# Altium PCB ESP32C_RF.PcbDoc
Units mil, origin at the board's own origin, x right, y up, seen from the top; angles counter-clockwise.
Board outline 1590 x 1660 mil, 4 copper layers (L1(Sig), L2 (GND), L3(GND), L4(Sig)), stack 62.63 mil thick; 55 components, 45 nets, 205 pads, 89 vias.
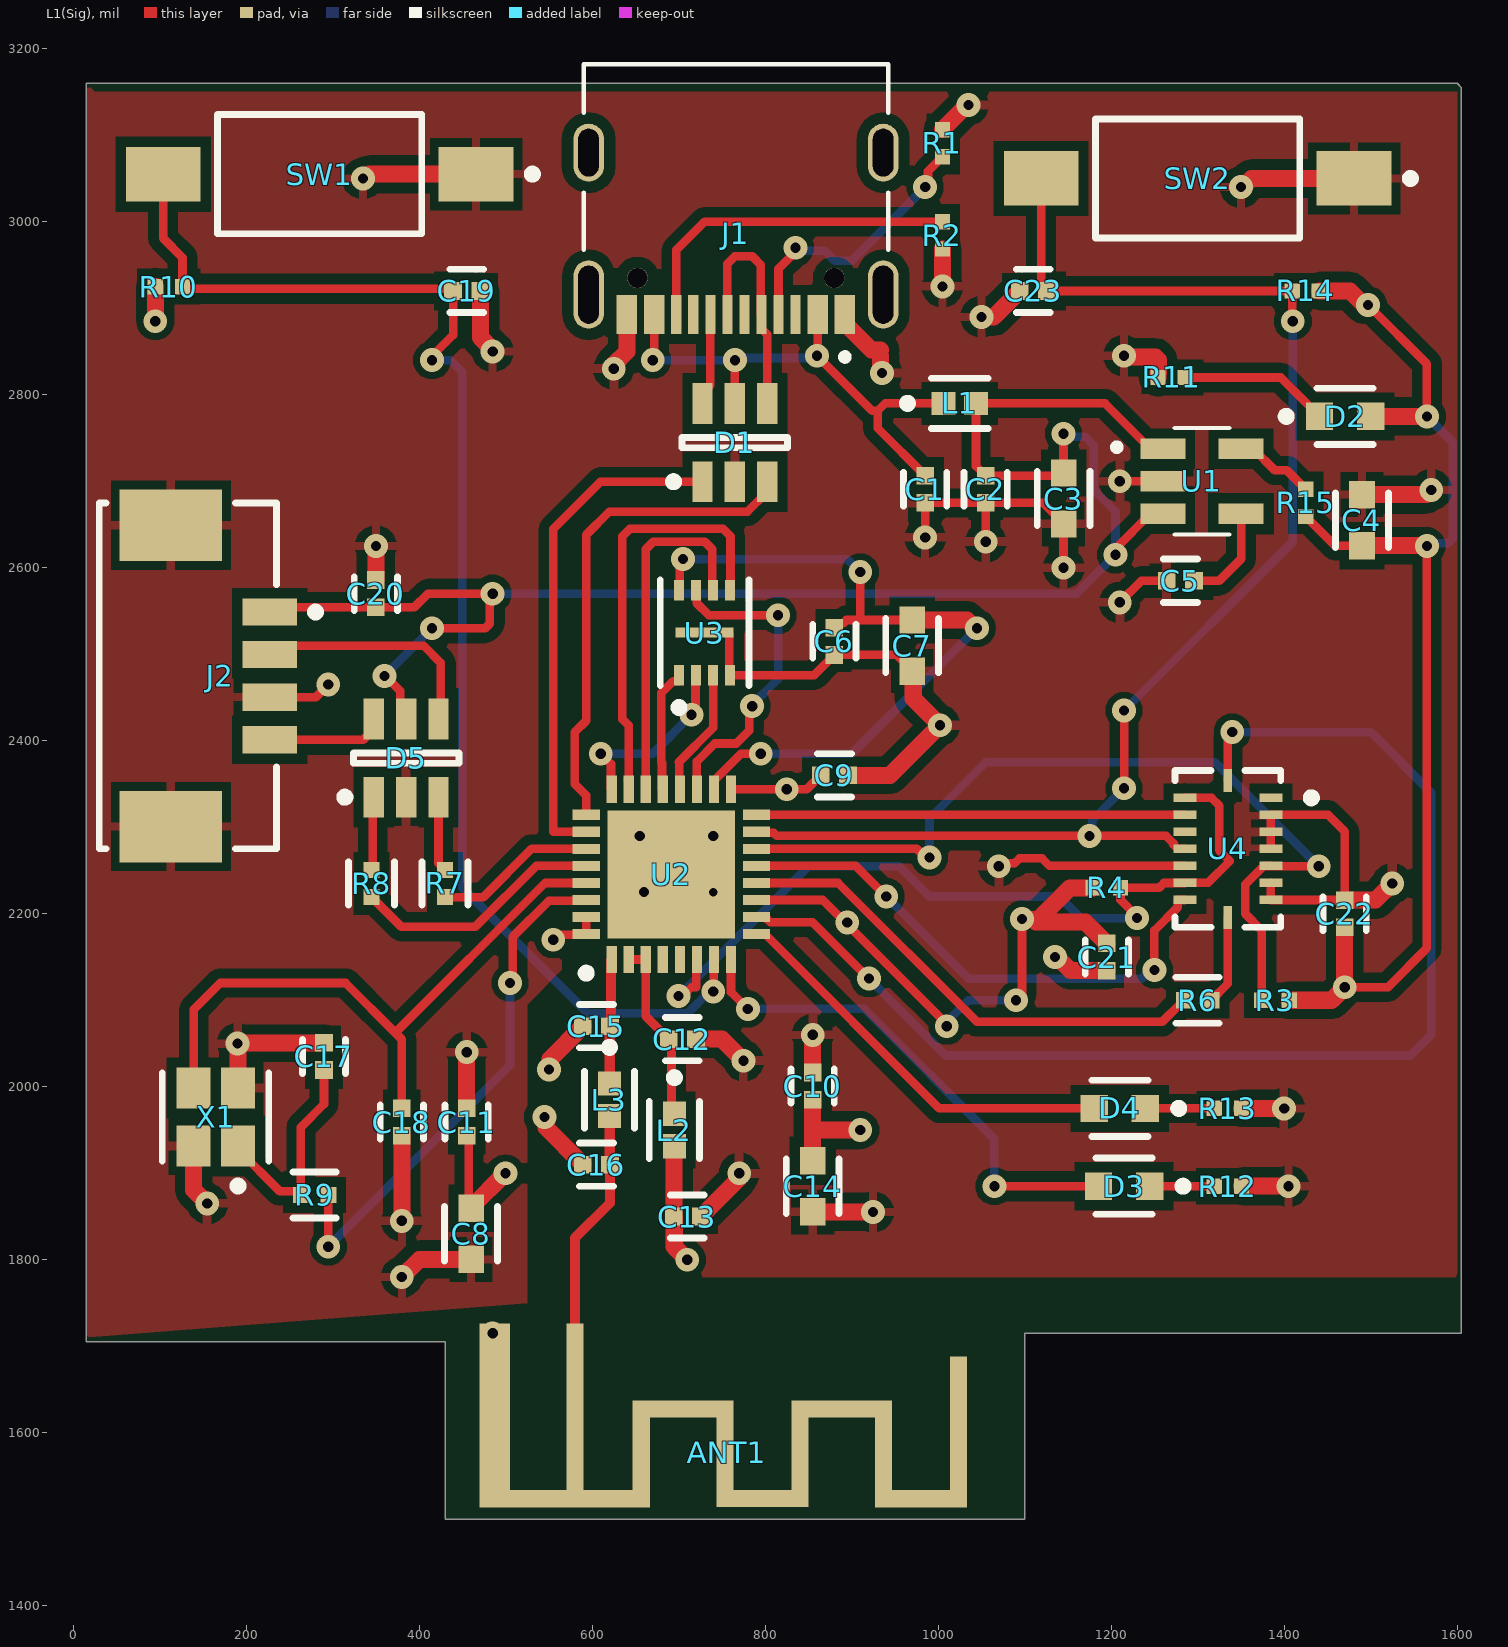
[diagram p0: L1(Sig) view]
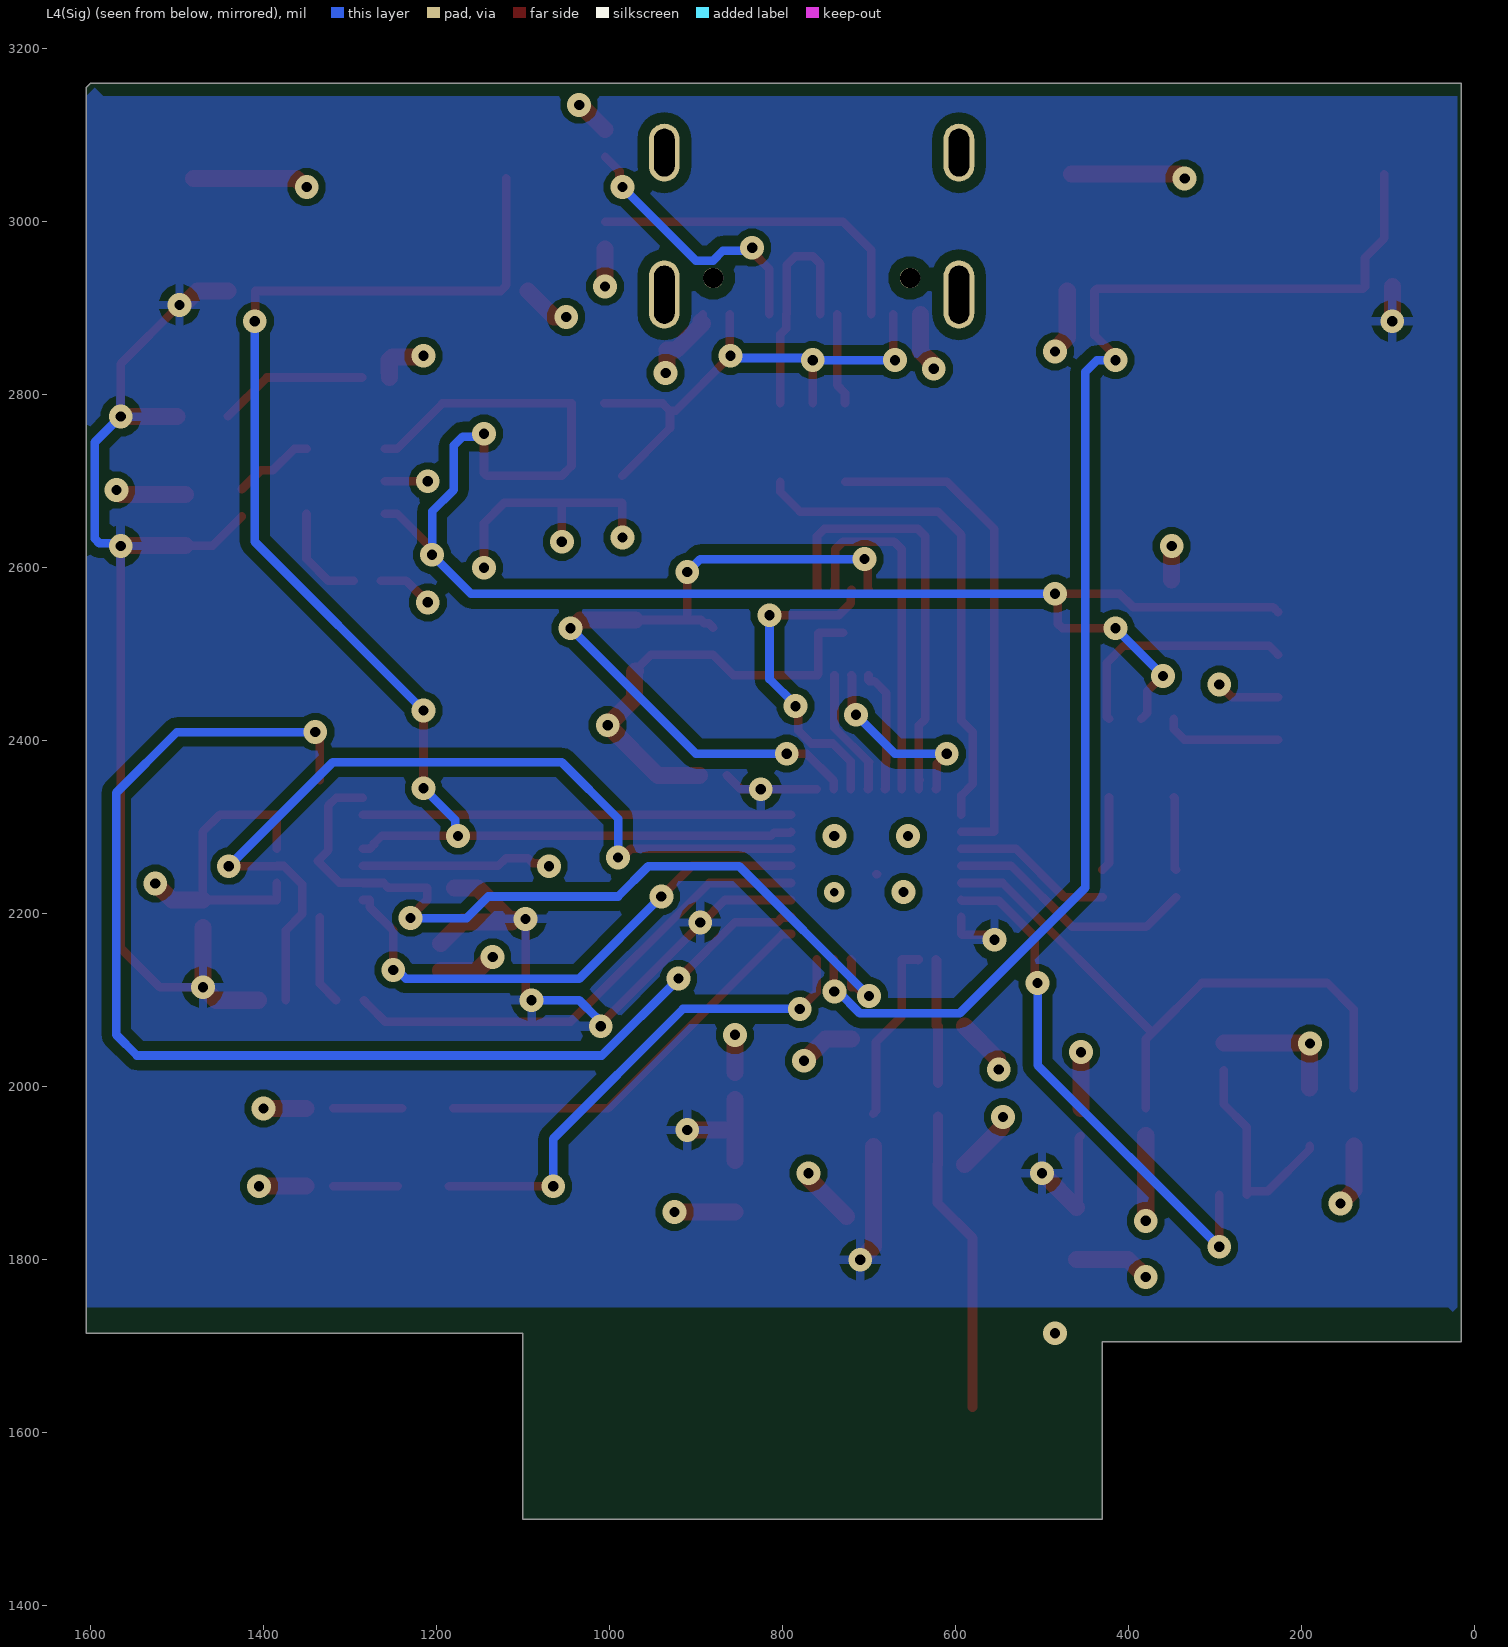
[diagram p1: L4(Sig) view, seen from below]
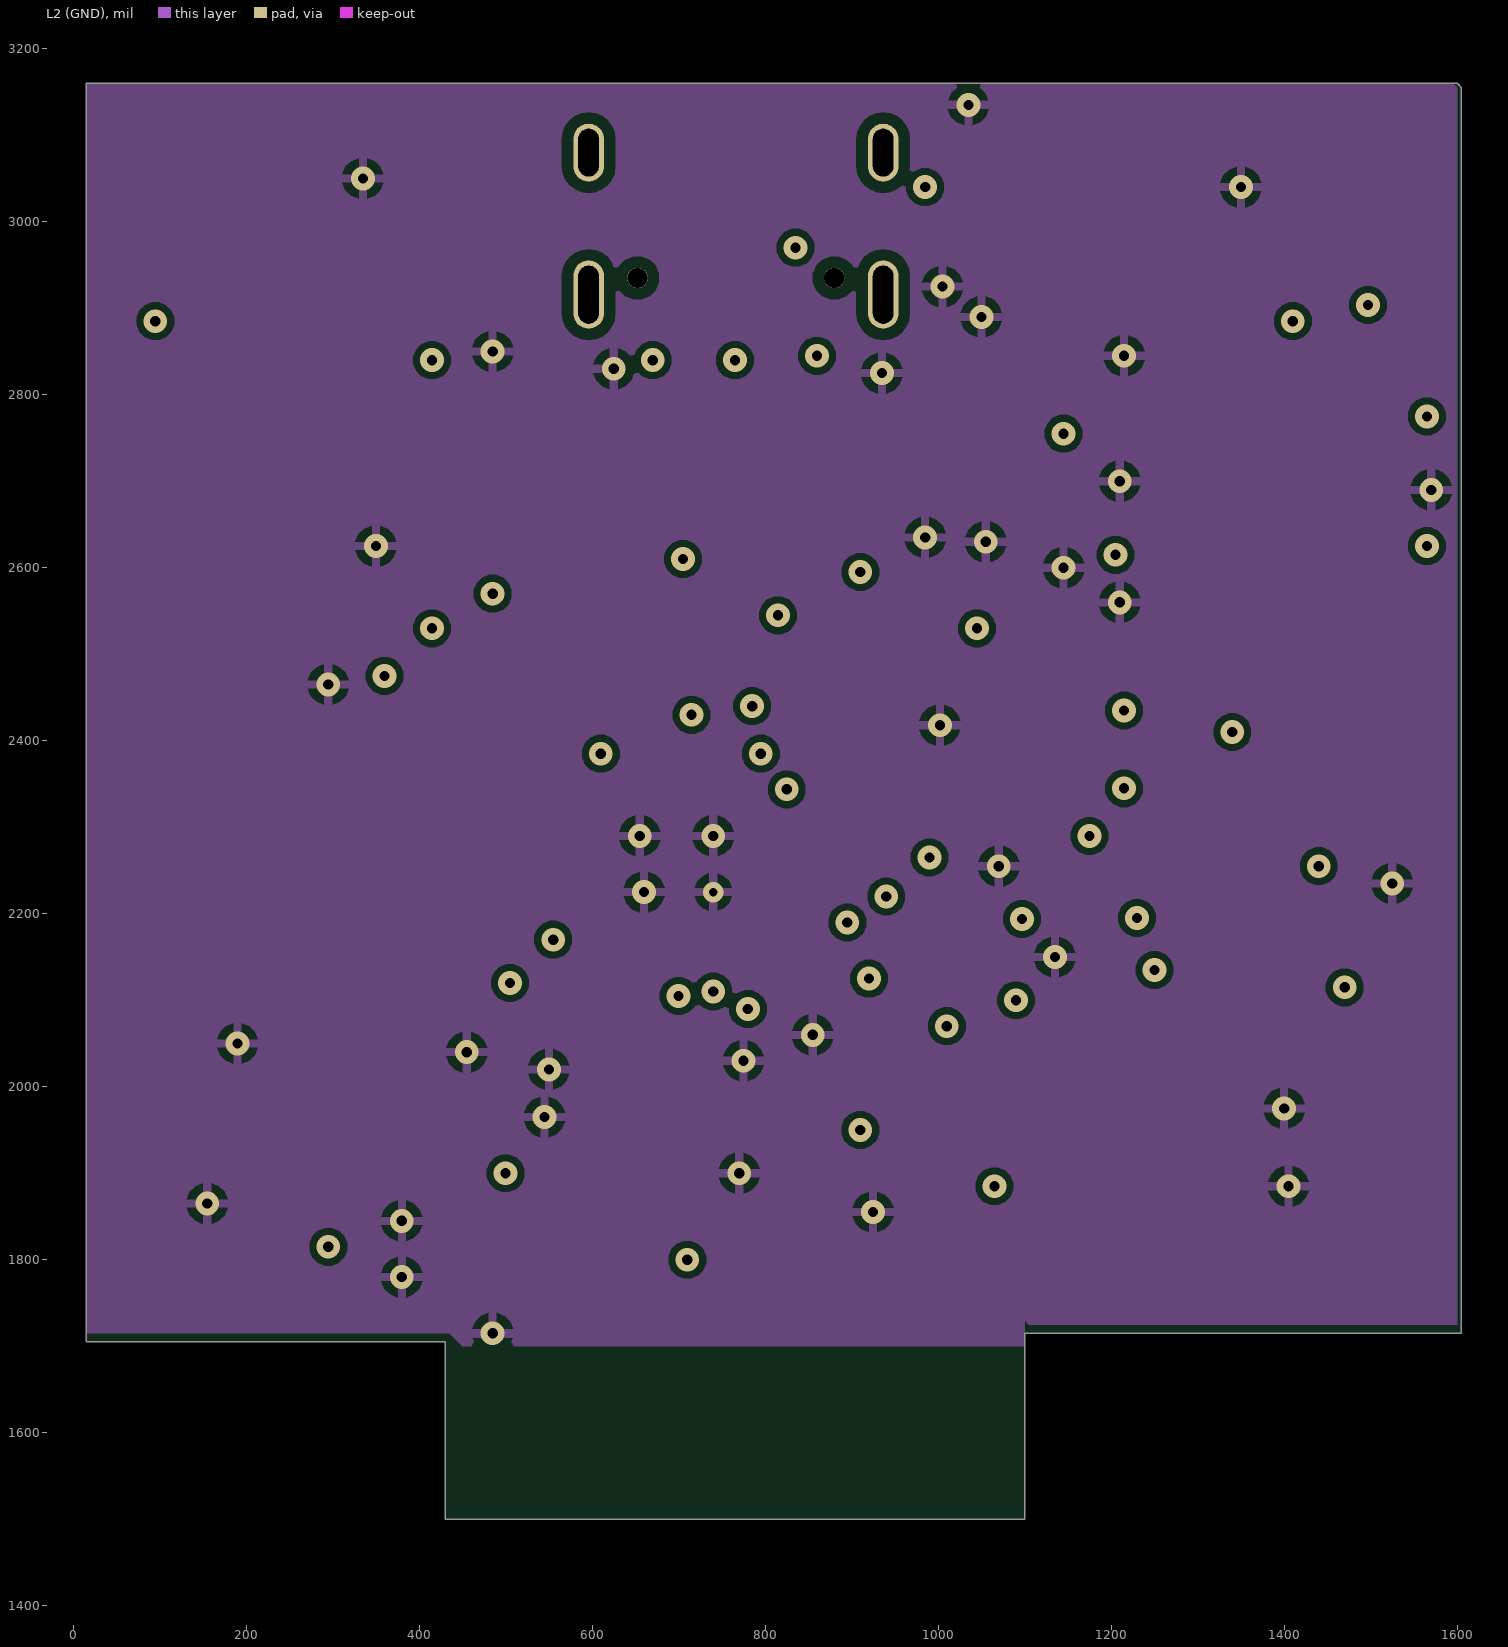
[diagram p2: L2 (GND)]
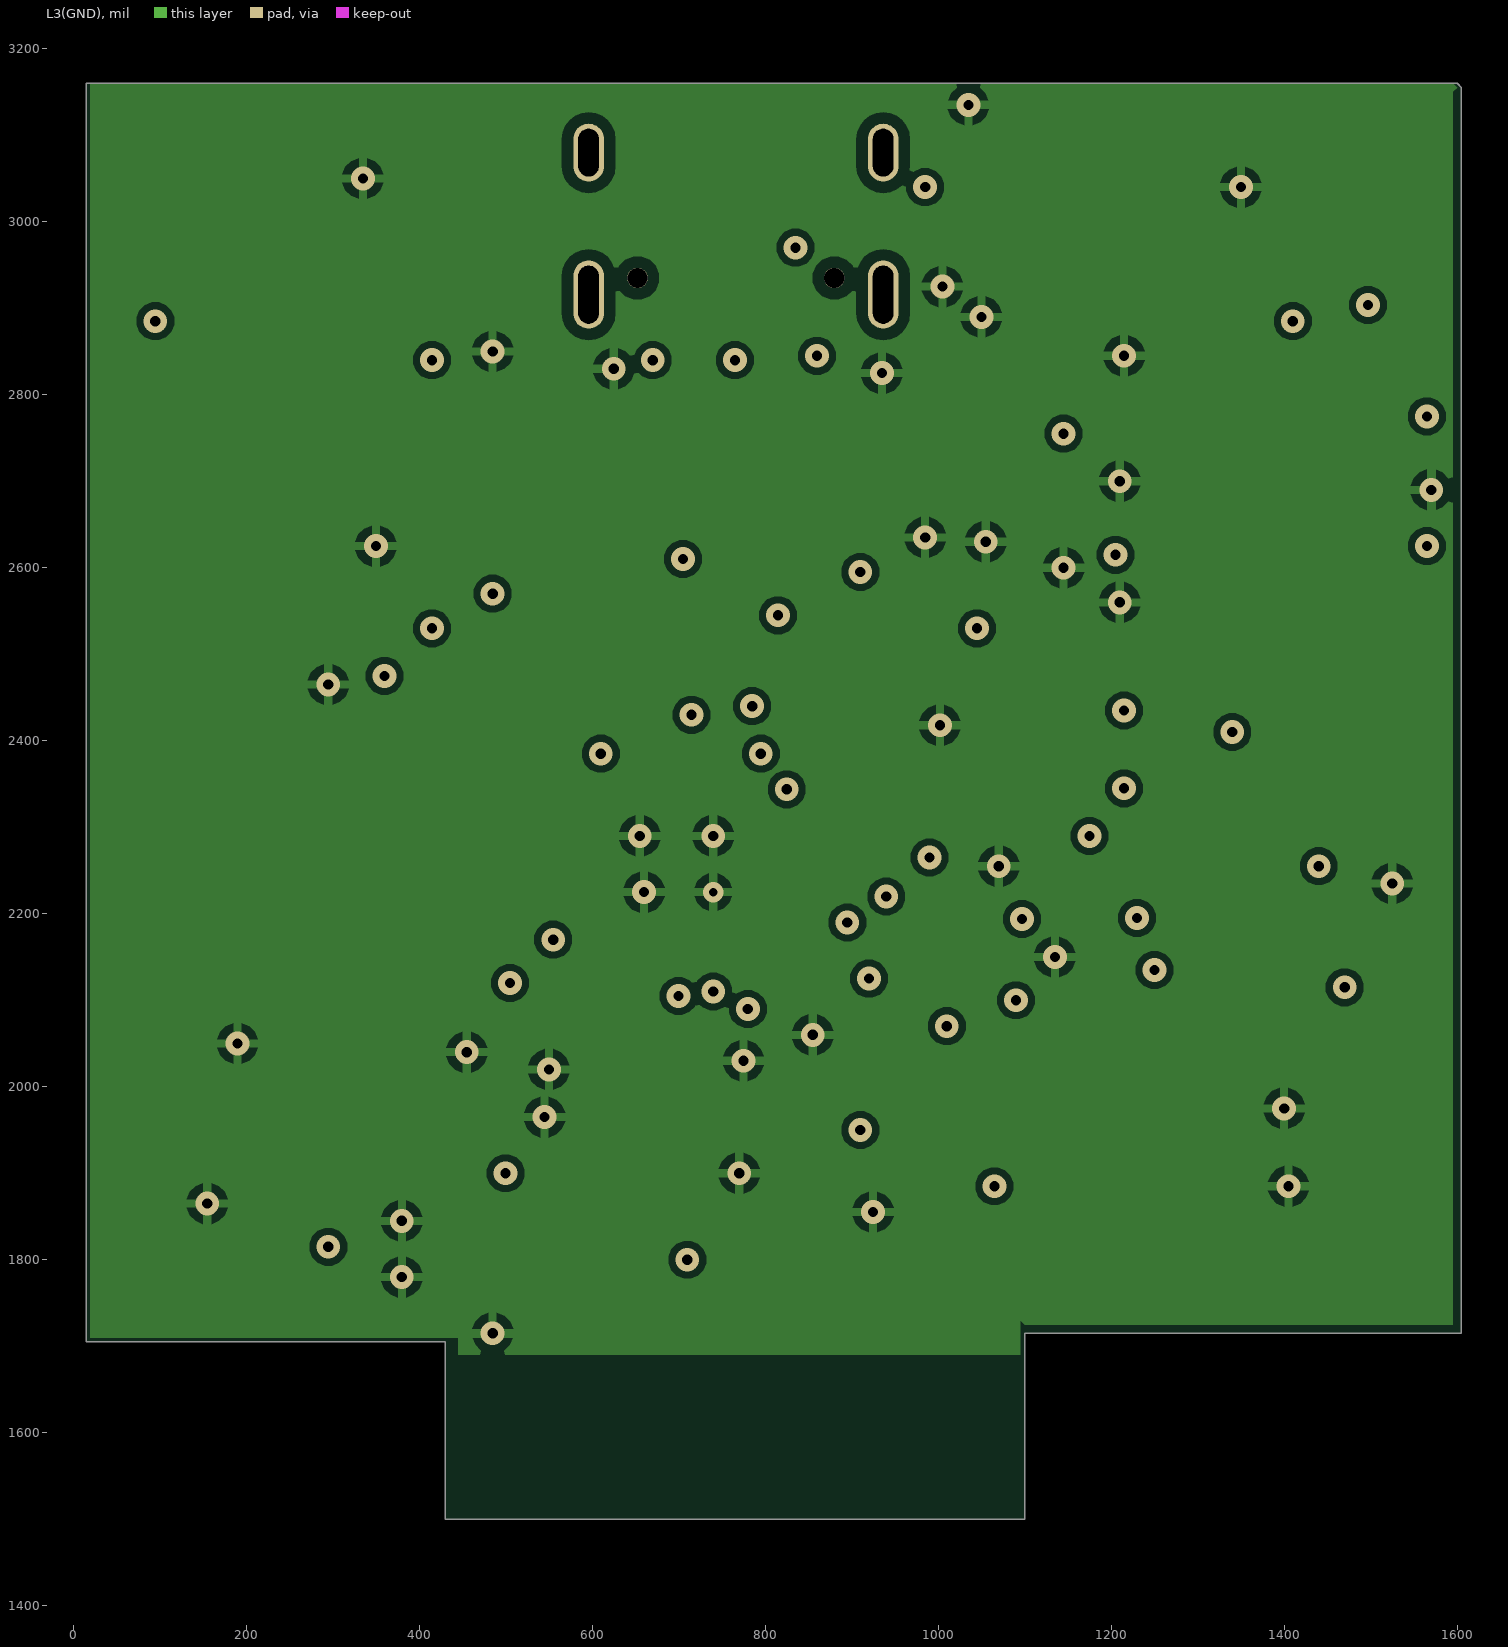
[diagram p3: L3(GND)]
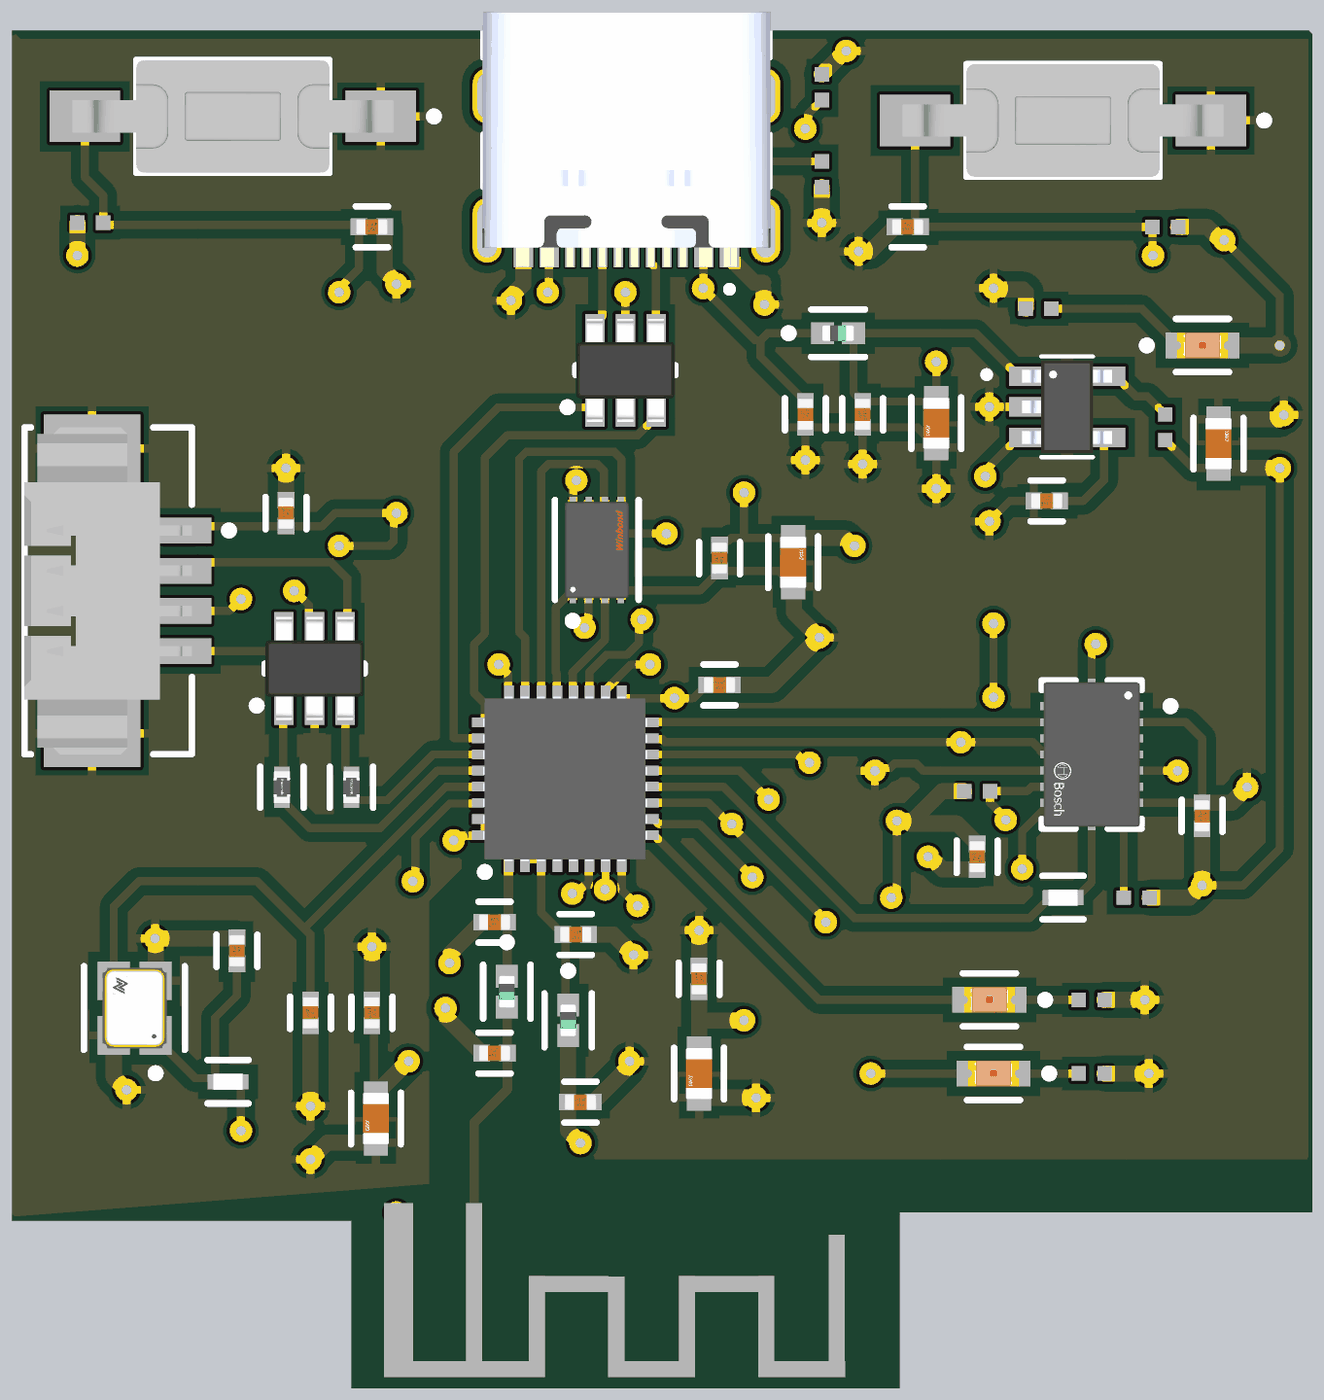
[diagram p4: 3D render of the assembled board from above, using the file's embedded part models]

## Layer stack, top to bottom
Top Solder: solder mask 1, SM-003, Dk 4
L1(Sig): signal copper 1.378
Dielectric 2: prepreg 8.2835, PP-017, Dk 4.3
L2 (GND): signal copper 0.689
Dielectric 1: core 41.9291, Core-039, Dk 4.8
L3(GND): signal copper 0.689
Dielectric 3: prepreg 8.2835, PP-017, Dk 4.3
L4(Sig): signal copper 1.378
Bottom Solder: solder mask 1, SM-003, Dk 4

## Board outline
1100,1715 1605,1715 1605,3155 1600,3160 15,3160 15,1705 430,1705 430,1500 1100,1500

## Design rules (kind name [scope] priority, off if disabled: settings)
Clearance [All] p1: gap=5.91 ignorepadtopadclearanceinfootprint=FALSE except(7.87: Arc-Via Track-Via Via-Fill Via-Poly Via-Region; 10: Via-Via; 11.81: Arc-Fill Arc-Poly Arc-Region Track-Fill Track-Poly Track-Region SMDPad-Fill SMDPad-Poly SMDPad-Region Fill-Fill Fill-Poly Fill-Region Poly-Poly Poly-Region Region-Region; 12.99: Arc-THPad Track-THPad THPad-Fill THPad-Poly THPad-Region; 19.68: Arc-Arc Arc-Track Track-Track)
DiffPairsRouting [All] p1: maxlimit=10 minlimit=10 mostfreqgap=10 toplayer_minwidth=7.87 toplayer_maxwidth=15 toplayer_prefwidth=15 midlayer1_minwidth=7.87 midlayer1_maxwidth=15 midlayer1_prefwidth=15 midlayer2_minwidth=7.87 midlayer2_maxwidth=15 midlayer2_prefwidth=15 bottomlayer_minwidth=7.87 bottomlayer_maxwidth=15 bottomlayer_prefwidth=15 maxuncoupledlength=500
PolygonConnect [All] p1: connectstyle=Relief reliefconductorwidth=10 reliefentries=4 polygonreliefangle="90 Angle" airgapwidth=10
RoutingVias [All] p1: holewidth=7.87 width=19.68 viastyle="Through Hole" minholewidth=7.87 minwidth=19.68 maxholewidth=39.37 maxwidth=39.37
SolderMaskExpansion [All] p1: expansion=4 istentingtop=FALSE
Width [All] p1: maxlimit=23.62 minlimit=9.84 preferedwidth=10
29 further rules are at their usual default settings.

## Classes and differential pairs
differential pair MCU_USB_D: +MCU_USB_D_P -MCU_USB_D_N

## Components (designator, comment, footprint, x,y, rotation, side; value= is the part's Value field where it differs from the comment)
ANT1 "Antenna AN043" Antenna_AN043 454.21,1720.75 r0 top
C1 "100n" FP-C0402-BB-MFG 985,2690.75 r270 top value="0.10 μF"
C2 "100n" FP-C0402-BB-MFG 1055,2690.75 r270 top value="0.10 μF"
C3 "10u" FP-0603-L_1_6_0_15-W_0_81-MFG 1145,2680 r270 top
C4 "10u" FP-0603-L_1_6_0_15-W_0_81-MFG 1490,2655 r90 top
C5 "100n" FP-C0402-BB-MFG 1280,2585 r180 top value="0.10 μF"
C6 "100n" FP-C0402-BB-MFG 880,2515 r270 top value="0.10 μF"
C7 "10u" FP-0603-L_1_6_0_15-W_0_81-MFG 970,2510 r90 top
C8 "10u" FP-0603-L_1_6_0_15-W_0_81-MFG 460,1830 r270 top
C9 "100n" FP-C0402-BB-MFG 880,2360 r0 top value="0.10 μF"
C10 "100n" FP-C0402-BB-MFG 855,2000.75 r90 top value="0.10 μF"
C11 "100n" FP-C0402-BB-MFG 455,1959.25 r90 top value="0.10 μF"
C12 "100n" FP-C0402-BB-MFG 704.25,2055 r0 top value="0.10 μF"
C13 "100n" FP-C0402-BB-MFG 710,1850 r0 top value="0.10 μF"
C14 "10u" FP-0603-L_1_6_0_15-W_0_81-MFG 855,1885 r270 top
C15 "3.3pF" FP-C0402-BB-MFG 605,2070 r180 top value="0.10 μF"
C16 "3.3pF" FP-C0402-BB-MFG 605,1910 r180 top value="0.10 μF"
C17 "10p" FP-C0402-BB-MFG 290,2035 r90 top value="0.10 μF"
C18 "10p" FP-C0402-BB-MFG 380,1959.25 r270 top value="0.10 μF"
C19 "100n" FP-C0402-BB-MFG 455,2920 r0 top value="0.10 μF"
C20 "100n" FP-C0402-BB-MFG 350,2570 r90 top value="0.10 μF"
C21 "100n" FP-C0402-BB-MFG 1195,2150 r270 top value="0.10 μF"
C22 "100n" FP-C0402-BB-MFG 1470,2200 r90 top value="0.10 μF"
C23 "100n" FP-C0402-BB-MFG 1110,2920 r180 top value="0.10 μF"
D1 "USBLC6-2SC6" STM-SOT23-6L_V 765,2744.72 r90 top
D2 "LTST-C190KRKT" FP-LTST-C190KRKT-MFG 1470.47,2775 r0 top
D3 "LTST-C190KRKT" FP-LTST-C190KRKT-MFG 1215,1885 r180 top
D4 "LTST-C190KRKT" FP-LTST-C190KRKT-MFG 1210,1975 r180 top
D5 "USBLC6-2SC6" STM-SOT23-6L_V 385,2380 r90 top
J1 "TYPE-C-31-M-12" HRO_TYPE-C-31-M-12 766.22,3079.88 r180 top
J2 "53261-0471" MOLEX-53261-0471_V 170,2475 r270 top
L1 "2.2nH" FP-LQG15HH_02-IPC_A 1025,2790 r0 top
L2 "2.2nH" FP-LQG15HH_02-IPC_A 695,1950 r270 top
L3 "2.2nH" FP-LQG15HH_02-IPC_A 620,1985 r270 top
R1 "5.1k" RESC1005X40X25LL05T05 1005,3090.75 r270 top
R2 "5.1k" RESC1005X40X25LL05T05 1005,2984.25 r90 top
R3 "5.1K" RESC1005X40X25LL05T05 1390,2100 r0 top
R4 "5.1k" RESC1005X40X25LL05T05 1195,2230 r180 top
R6 "22R" FP-CRCW0402-e3-IPC_C 1300,2100 r180 top
R7 "470R" FP-ERJ2RK-IPC_C 430,2235 r270 top
R8 "470R" FP-ERJ2RK-IPC_C 345,2235 r270 top
R9 "22R" FP-CRCW0402-e3-IPC_C 279.17,1875 r180 top
R10 "5.1k" RESC1005X40X25LL05T05 110.75,2925 r180 top
R11 "1K" RESC1005X40X25LL05T05 1270,2820 r0 top
R12 "1K" RESC1005X40X25LL05T05 1335,1885 r180 top
R13 "1K" RESC1005X40X25LL05T05 1335,1975 r180 top
R14 "5.1k" RESC1005X40X25LL05T05 1425,2920 r0 top
R15 "5.1k" RESC1005X40X25LL05T05 1425,2675 r90 top
SW1 "FSMSMTR" TECO-FSMSMTR_V 285,3055 r180 top
SW2 "FSMSMTR" TECO-FSMSMTR_V 1300,3050 r180 top
U1 "SPX3819M5-L-3-3" SOT95P280X145-5N 1305,2700 r0 top
U2 "ESP32-C3" QFN50P500X500X90-33N-D 691.57,2245.47 r90 top
U3 "W25Q16JVUXIQ" FP-UX-MFG 730,2525 r90 top
U4 "BMI055" FP-BMI055-MFG 1335,2275 r0 top
X1 "40MHz" FP-NX2520SA-MFG 165,1965 r90 top

## Footprints (in the part's own frame and the unit in brackets; to place one, negate y for a bottom-side part, rotate by r counter-clockwise, add the part's x,y. Pads: shape width x height; smd on the part's side, far side on the other; paste and mask are expansions set on the pad)
Antenna_AN043 [mm]
  rect 0.5x4.9 smd mask+0: 1(3.195,-2.305)
  rect 0.9x4.9 smd mask+0: 2(0.845,-2.31)
  rect 5x0.5 smd mask+0: 3(2.895,-5.005)
  rect 0.5x2.64 smd mask+0: 4(5.145,-3.435) 6(7.61,-3.445) 8(9.807,-3.433) 10(12.265,-3.435)
  rect 2x0.5 smd mask+0: 5(6.365,-2.37) 9(11.027,-2.368)
  rect 2.7x0.5 smd mask+0: 7(8.708,-5.002) 11(13.363,-5.005)
  rect 0.5x3.94 smd mask+0: 12(14.46,-2.798)
FP-0603-L_1_6_0_15-W_0_81-MFG [mm]
  rect 0.8x0.75 smd paste+0 mask+0: 1(-0.75,0) 2(0.75,0)
  silkscreen extent -0.8,-0.77 0.8,0.77, body extent -1.25,-0.58 1.25,0.58, height 0.25
FP-BMI055-MFG [mm]
  rect 0.675x0.25 smd paste+0 mask+0: 1(1.262,1.5) 2(1.262,1) 3(1.262,0.5) 4(1.262,0) 5(1.262,-0.5) 6(1.262,-1) 7(1.262,-1.5) 9(-1.262,-1.5) 10(-1.262,-1) 11(-1.262,-0.5) 12(-1.262,0) 13(-1.262,0.5) 14(-1.262,1) 15(-1.262,1.5)
  rect 0.25x0.675 smd paste+0 mask+0: 8(0,-2.013) 16(0,2.013)
  silkscreen extent -1.55,-2.3 2.58,2.3, body extent -2.1,-2.85 2.1,2.85, height 0.25
FP-C0402-BB-MFG [mm]
  rect 0.52x0.52 smd paste+0 mask+0: 1(-0.4,0) 2(0.4,0)
  silkscreen extent -0.5,-0.64 0.5,0.64, body extent -0.8,-0.4 0.8,0.4, height 0.25
FP-CRCW0402-e3-IPC_C [mil]
  rect 18.43x18.6 smd paste+0 mask+0: 1(-15.83,0) 2(15.83,0)
  silkscreen extent -25,-27 25,27, body extent -29,-15 29,15, height 10
FP-ERJ2RK-IPC_C [mil]
  rect 18.43x18.6 smd paste+0 mask+0: 1(-15.83,0) 2(15.83,0)
  silkscreen extent -25,-27 25,27, body extent -29,-15 29,15, height 10
FP-LQG15HH_02-IPC_A [mil]
  rect 28.16x26.48 smd paste+0 mask+0: 1(-18.84,0) 2(18.84,0)
  silkscreen extent -65,-29 33,29, body extent -41,-21 41,21, height 10
FP-LTST-C190KRKT-MFG [mm]
  rect 0.8x0.8 smd paste+0 mask+0: 1(-0.75,0) 2(0.75,0)
  silkscreen extent -1.85,-0.82 0.82,0.82, body extent -1.25,-0.55 1.25,0.55, height 0.25
FP-NX2520SA-MFG [mm]
  rect 1.2x1 smd paste+0 mask+0: 1(-0.85,-0.65) 2(0.85,-0.65) 3(0.85,0.65) 4(-0.85,0.65)
  silkscreen extent -2.15,-1.56 1.3,1.58, body extent -1.55,-1.25 1.55,1.25, height 0.25
FP-UX-MFG [mm]
  rect 0.6x0.3 smd paste-1000 mask-1000: 1(-1.25,0.75) 2(-1.25,0.25) 3(-1.25,-0.25) 4(-1.25,-0.75) 5(1.25,-0.75) 6(1.25,-0.25) 7(1.25,0.25) 8(1.25,0.75)
  rect 0.3x1.7 smd paste-1000 mask+0: 9(0,0)
  silkscreen extent -2.32,-1.3 1.55,1.3, body extent -1.75,-1.15 1.75,1.15, height 0.25
HRO_TYPE-C-31-M-12 [mm]
  rect 0.6x1.14 smd mask+0.05: A1_B12(-3.2,4.75) A4_B9(-2.4,4.75) B1_A12(3.2,4.75) B4_A9(2.4,4.75)
  rect 0.3x1.14 smd mask+0.05: A5(-1.25,4.75) A6(-0.25,4.75) A7(0.25,4.75) A8(1.25,4.75) B5(1.75,4.75) B6(0.75,4.75) B7(-0.75,4.75) B8(-1.75,4.75)
  oval 0.9x2 hole 0.6 slot 1.7 at 90 deg: S1(-4.325,4.17) S2(4.325,4.17)
  oval 0.9x1.7 hole 0.6 slot 1.4 at 90 deg: S3(-4.325,0) S4(4.325,0)
  round 0.6 hole 0.6 unplated: ""(-2.89,3.68) ""(2.89,3.68)
  silkscreen extent -4.47,-2.6 4.47,6.1, body extent -4.47,-2.6 4.47,5.31, height 3.31
MOLEX-53261-0471_V [mm] "SMD, 4-Leads, Body 10.15x5.2mm, Pitch 1.25mm"
  rect 0.8x1.6 smd: 1(-1.875,1.45) 2(-0.625,1.45) 3(0.625,1.45) 4(1.875,1.45)
  rect 2.1x3 smd: MP1(-4.425,-1.45) MP2(4.425,-1.45)
  silkscreen extent -5.08,-3.55 5.08,2.93, body extent -5.08,-3.55 5.07,1.65, height 3.4
QFN50P500X500X90-33N-D [mm]
  rect 0.8x0.3 smd: 1(-2.5,1.75) 2(-2.5,1.25) 3(-2.5,0.75) 4(-2.5,0.25) 5(-2.5,-0.25) 6(-2.5,-0.75) 7(-2.5,-1.25) 8(-2.5,-1.75) 17(2.5,-1.75) 18(2.5,-1.25) 19(2.5,-0.75) 20(2.5,-0.25) 21(2.5,0.25) 22(2.5,0.75) 23(2.5,1.25) 24(2.5,1.75)
  rect 0.3x0.8 smd: 9(-1.75,-2.5) 10(-1.25,-2.5) 11(-0.75,-2.5) 12(-0.25,-2.5) 13(0.25,-2.5) 14(0.75,-2.5) 15(1.25,-2.5) 16(1.75,-2.5) 25(1.75,2.5) 26(1.25,2.5) 27(0.75,2.5) 28(0.25,2.5) 29(-0.25,2.5) 30(-0.75,2.5) 31(-1.25,2.5) 32(-1.75,2.5)
  rect 3.75x3.75 smd: 33(0,0)
  silkscreen extent -3.02,2.37 -2.78,2.62, body extent -2.56,-2.54 2.54,2.56, height 0.9
RESC1005X40X25LL05T05 [mm] "Chip Resistor, 2-Leads, Body 1.00x0.50mm, IPC High Density"
  rect 0.45x0.45 smd: 1(-0.4,0) 2(0.4,0)
  body extent -0.53,-0.27 0.53,0.28, height 0.4
SOT95P280X145-5N [mm]
  rect 1.32x0.6 smd: 1(-1.15,0.95) 2(-1.15,0) 3(-1.15,-0.95) 4(1.15,-0.95) 5(1.15,0.95)
  silkscreen extent -2.6,-1.56 0.8,1.56, body extent -1.4,-1.45 1.4,1.45, height 1.45
STM-SOT23-6L_V [mm] "SOT23, 6-Leads, Body 3.05x1.75mm, Pitch 0.95mm"
  rect 1.2x0.6 smd: 1(-1.15,0.95) 2(-1.15,0) 3(-1.15,-0.95) 4(1.15,-0.95) 5(1.15,0) 6(1.15,0.95)
  silkscreen extent -1.27,-1.55 0.15,1.92, body extent -1.6,-1.53 1.6,1.53, height 1.45
TECO-FSMSMTR_V [mm] "SMD, 2-Leads, Body 6x3.5mm, Pitch 9.19mm"
  rect 2.2x1.6 smd: 1(-4.595,0)
  rect 2.18x1.6 smd: 2(4.595,0)
  silkscreen extent -6.37,-1.75 3,1.75, body extent -4.98,-1.75 4.98,1.75, height 4.4

## Part data
C1 C2 C5 C6 C9 C10 C11 C12 C13 C15 C16 C17 C18 C19 C20 C21 C22 C23: library part CMP-2008-02046-2, "CAP CER 0.1UF 10V X5R 0402", Capacitance="0.10 μF", Manufacturer=Kemet, Manufacturer Part Number=C0402C104K8PACTU, Package=C0402-BB, Temperature="-55°C to +125°C", Temperature Characteristic=X5R, Temperature Coefficient=15%, Temperature Range High=+125°C, Temperature Range Low=-55°C, Tolerance=0.1, Voltage Rating="10 V", Automotive=No, Category=Cap, ComponentLink2Description=Datasheet, ComponentLink2URL=https://content.kemet.com/datasheets/KEM_C1002_X7R_SMD.pdf, Device Class L1="Passive Components", Device Class L2=Capacitors, Device Class L3="Ceramic Capacitors", Digikey Description="CAP CER 0.1UF 10V X5R 0402", Height=0.55mm, Ipc Land Pattern Name=CAPC10050X50, Lead Free=Yes, Material=Ceramic, Mouser Description="Capacitor 100 nF 10 VDC 0402", Octopart=https://octopart.com/c0402c104k8pactu-kemet-140039, RoHS=TRUE
C3 C4 C7 C8 C14: library part CMP-1035-02592-4, "General Purpose Ceramic Capacitor, 0603, 100nF, 10%, X7R, 15%, 50V", Capacitance=100nF, Case Code (Imperial)=0603, Case Code (Metric)=1608, Dielectric=X7R, Dielectric Material=Ceramic, Max Operating Temperature=125°C, Min Operating Temperature=-55°C, Package Quantity=1, Tolerance=10%, Voltage=50V, Case/Package=0603, Contact Plating=Tin, Depth=0.81mm, Dissipation Factor=2.5%, Height=0.9mm, Lead Free="Lead Free", Length=1.6mm, Mount="Surface Mount", Number of Pins=2, Packaging="Tape and Reel", Radiation Hardening=No, REACH SVHC="No SVHC", Termination=SMD/SMT, Thickness=0.035inch, Voltage Rating=50V, Voltage Rating (DC)=50V, Width=0.81mm
D1 D5: library part CMP-2000-05378-1, "Very low capacitance ESD protection, 3.5 pF, -40 to 125 degC, 6-Pin SOT23, RoHS, Tape and Reel", Capacitance Value=3.5pF, Clamping Voltage=17V, Leakage Current=0.15uA, Manufacturer=STMicroelectronics, Operating Temp Range=-40Cto125C, Operating Temperature Classification=Automotive, Operating Temperature Max Deg. C=125C, Operating Temperature Min Deg. C=-40C, Package / Case=SOT-23, Package Description="6-Pin Small Outline Transistor, Body 2.925 x 1.625 mm, Pitch 0.95 mm", Package Reference=SOT23-6L, Peak Pulse Current=5A, Reverse Breakdown Voltage=6V, Reverse Stand-off Voltage=5V, Test Current (It)=1mA, Clamping Voltage (Max)=17V, Configuration=Dual, Datasheet URL=http://www.st.com/st-web-ui/static/active/en/resource/technical/document/datasheet/CD00050750.pdf, Datasheet Version="Rev. 5, 10/2011", Direction Type=Uni-Directional, Leakage Current (Max)=0.15uA, Manufacturer URL=http://www.st.com/, Mounting=SurfaceMount, Mounting Style=SurfaceMount, Number of Elements=1, Packaging=TapeandReel, Pin Count=6, Polarity=Uni-Directional, Product Depth (mm)=1.75mm, Product Height (mm)=1.3mm, Product Length (mm)=3.05mm, Rad Hardened=No, Suppressor Type=DiodeArrays, Working Voltage=5V, Working Voltage (Max)=5V
D2 D3 D4: library part CMP-1674-00011-2, "LED RED CLEAR CHIP SMD", Case Code (Imperial)=0603, Case Code (Metric)=1608, Color=Red, Forward Current=30mA, Forward Voltage=2.4V, Lens Color=Colorless, Max Operating Temperature=85°C, Min Operating Temperature=-55°C, Package Quantity=1, Power Dissipation=75mW, Reverse Voltage=5V, Test Current=20mA, Case/Package=0603, Depth=0.8mm, Dominant Wavelength=631nm, Height=0.8mm, Illumination Color=Red, Lead Free="Lead Free", Length=1.6mm, Lens Style=Diffused, Lens Transparency=Clear, Luminous Intensity=54mcd, Mount="Surface Mount", Number of Elements=1, Number of LEDs=1, Number of Pins=2, Packaging="Tape and Reel", Power Rating=75mW, Radiation Hardening=No, Viewing Angle=130°, Wavelength=639nm, Width=0.8mm
J1: "USB Connectors 24 Receptacle 1 8.94*7.3mm RoHS", Package=Package, Availability="Not in stock", Check_prices=https://www.snapeda.com/parts/TYPE-C-31-M-12/HRO+Electronics+Co.%252C+Ltd./view-part/?ref=eda, MF="HRO Electronics Co., Ltd.", MP=TYPE-C-31-M-12, Price=None, SnapEDA_Link=https://www.snapeda.com/parts/TYPE-C-31-M-12/HRO+Electronics+Co.%252C+Ltd./view-part/?ref=snap
J2: library part CMP-2000-05238-1, "Male Header, Pitch 1.25 mm, 1 x 4 Position, Height 3.4 mm, -40 to 85 degC, RoHS, Tape and Reel", Current Rating=1A, Manufacturer=Molex, Package Description="1.25mm Pitch PicoBlade(TM) Header, Surface Mount, Right Angle, Lead-Free, 4 Circuits", Voltage Rating=125V, Brand=Molex, Contact Material=PhosphorBronze, Contact Plating=Tin, Datasheet URL=http://www.molex.com/pdm_docs/sd/532610471_sd.pdf, Datasheet Version="Rev. G, 01/2012", Factory Pack Quantity=1000, Housing Material=Thermoplastic, Manufacturer URL=http://www.molex.com/, Mounting Angle=Right, Mounting Style=SMD/SMT, Number of Positions=4, Number of Positions / Contacts=4, Number of Rows=1, Packaging=Reel, Pitch=1.25mm, Product Category=Headers&WireHousings, Product Type=Headers, RoHS=Details, Series=53261, Termination Style=SMD, Tradename=PicoBlade, Type=Shrouded
L1 L2 L3: library part CMP-06042-011103-1, "Multilayer type RF Inductor 3.6nH ±0.3nH 0.13Ω 700mA 0402", Case Code (Imperial)=0402, Case Code (Metric)=1005, Current=300mA, DC Resistance (DCR)=190mR, Inductance=3.6nH, Max Operating Temperature=125°C, Min Operating Temperature=-55°C, Package Quantity=10000, Self Resonant Frequency=6GHz, Test Frequency=100MHz, Case/Package=0402, Core Material=Air, Current Rating=300mA, DC Current=300mA, Depth=0.55mm, Height=0.5mm, Height - Seated (Max)=0.022inch, Lead Free="Lead Free", Length=0.039inch, Max DC Current=300mA, Military Standard=Not, Mount="Surface Mount", Number of Pins=2, Packaging="Tape and Reel", Q Factor=8, Radiation Hardening=No, REACH SVHC="No SVHC", Shielding=Unshielded, Termination=SMD/SMT, Width=0.5mm
R1 R2 R3 R4 R10 R11 R12 R13 R14 R15: library part CMP-2002-08382-1, Manufacturer="Vishay Dale", Part Number=CRCW040222R0FKED
R6 R9: library part CMP-1011-00397-3, "RES Thick Film, 100Ω, 1%, 0.063W, 100ppm/°C, 0402", Case Code (Imperial)=0402, Case Code (Metric)=1005, Max Operating Temperature=155°C, Max Power Dissipation=63mW, Min Operating Temperature=-55°C, Package Quantity=10, Resistance=100R, Temperature Coefficient=100ppm/°C, Tolerance=1%, Voltage Rating=50V, Case/Package=0402, Composition="Thick Film", Contact Plating=Tin, Depth=0.5mm, Features="Automotive AEC-Q200", Height=0.35mm, Lead Free="Lead Free", Length=1mm, Military Standard=Not, Mount="Surface Mount", Number of Terminations=2, Packaging="Tape and Reel", Power Rating=63mW, Radiation Hardening=No, Termination=SMD/SMT, Voltage Rating (DC)=50V, Weight=2.3E-05oz, Width=0.02inch, Working Voltage=50V
R7 R8: library part CMP-2002-01153-2, "RES SMD 470 OHM 1% 1/10W 0402", Case Code (Imperial)=0402, Case Code (Metric)=1005, Max Operating Temperature=155°C, Max Power Dissipation=100mW, Min Operating Temperature=-55°C, Package Quantity=1, Resistance Tolerance=1%, Resistor Type="Thick Film", Temperature Coefficient=100ppm/°C, Voltage Rating=50V, Case/Package=0402, Construction=Rectangular, Contact Plating=Tin, Depth=0.5mm, Features="Automotive AEC-Q200", Height=0.35mm, Lead Free="Lead Free", Length=1mm, Military Standard=Not, Mount="Surface Mount", Number of Pins=2, Number of Terminations=2, Packaging="Tape and Reel", Power Rating=100mW, Radiation Hardening=No, Resistance=470R, RoHS Compliant=Yes, Series=ERJ, Technology="THICK FILM", Termination=SMD/SMT, Tolerance=1%, Voltage Rating (DC)=50V, Weight=2.8E-05oz, Width=0.02inch
SW1 SW2: library part CMP-2000-07501-1, "FSMSM Push Button Switch, 50 mA, -35 to 85 degC, 2-Pin SMD, RoHS, Tape and Reel", Case\/Package=SMD/SMT, Contact Current Rating=50mA, Contact Resistance=100mOhm, Manufacturer="TE Connectivity", Max Operating Temperature=85degC, Max Voltage Rating (DC)=12V, Min Operating Temperature=-35degC, Operating Force=180gf, Package Description="2-Pin Surface Mount Device, Body 6 x 3.5 mm, Pitch 9.19 mm", Package Quantity=1800, Voltage Rating (DC)=24V, Actuator Length=1.07mm, Actuator Material=Polyamide, Contact Material=Brass, Contact Plating=Silver, Current Rating=50mA, Datasheet URL=http://www.te.com/commerce/DocumentDelivery/DDEController?Action=showdoc&DocId=Customer+Drawing%7F1437566-3%7FC2%7Fpdf%7FEnglish%7FENG_CD_1437566-3_C2_1437566_3_1_c.dwg.pdf%7F1437566-4, Datasheet Version="Rev. C2, 08/2014", Electrical Life=20000Cycles, ELV=Compliant, Illumination Type=Illuminated, Lead Free=LeadFree, Manufacturer URL=http://www.te.com/, Mechanical Life=20000Cycles, Mount=SurfaceMount, Mounting Technology=SurfaceMount, Orientation=Straight, Package Reference=FSMSMTR, Packaging=TapeandReel, REACH SVHC=Unknown, RoHSCompliant=true, Switch Travel=0.25mm, Termination=GullWing, Throw Configuration=SPST
U1: "Linear Voltage Regulator IC Positive Fixed 1 Output 500mA SOT-23-5", Package="SOT-23-5 Exar", Check_prices=https://www.snapeda.com/parts/SPX3819M5-L-3-3/TR/MaxLinear%252C+Inc./view-part/?ref=eda, MF="MaxLinear, Inc.", MP=SPX3819M5-L-3-3/TR, SnapEDA_Link=https://www.snapeda.com/parts/SPX3819M5-L-3-3/TR/MaxLinear%252C+Inc./view-part/?ref=snap
U2: "Ultra­Low­Power SoC with RISC­V Single­Core CPU Supporting IEEE 802.11b/g/n (2.4 GHz Wi­Fi) and Bluetooth® 5 (LE)", LCSC=C2838500, Manufacturer=Espressif, Manufacturer Part Number=ESP32-C3
U3: library part CMP-78876-000011-1, "IC FLASH 16MBIT SPI/QUAD 8USON", RoHS Compliant=Yes
U4: library part CMP-191067-000009-1, "IMU ACCEL/GYRO I2C/SPI 16LGA", Case/Package=LGA, Max Operating Temperature=85°C, Min Operating Temperature=-40°C, Package Quantity=5000, Axis="X, Y, Z", Bandwidth=8Hz, Interface=I2C, Lead Free="Lead Free", Mount="Surface Mount", Number of Pins=16, Output Type=SPI, Packaging="Tape and Reel", Sensitivity=128LSB/g, Sensor Type=Accelerometer
X1: library part CMP-2000-05279-2, "CRYSTAL 16.0000MHZ 8PF SMD", Case/Package=SMD/SMT, ESR (Equivalent Series Resistance)=80R, Frequency=16MHz, Frequency Stability=25ppm, Frequency Tolerance=15ppm, Load Capacitance=8pF, Max Operating Temperature=85°C, Min Operating Temperature=-40°C, Package Quantity=3000, Height=0.022inch, Length=0.098inch, Mount="Surface Mount", Number of Pins=4, Packaging="Tape and Reel", Series Resistance=80R, Width=0.079inch

## Via types
v1: diameter 27.56, hole 11.81, L1(Sig) to L4(Sig), 88 vias
v2: diameter 23.62, hole 9.84, L1(Sig) to L4(Sig), 1 vias

## Nets (pads, with @x,y where several pads share a name; then routed paths per layer and width w, separated by ;. In a path a pad name is that pad's centre, name@x,y a point inside that pad or via, vN(x,y) a via of type N, cw(c..) or ccw(c..) an arc to the next point about the centre after c; other vN are vias at no path point)
+3V3: C4.1 C8.1 C9.1 C10.1 C11.1 C13.1 C14.1 C21.1 C22.1 D2.2 L2.2 R3.2 R4.2 R10.2 R14.2 R15.1 U2.11 U2.17 U2.31 U2.32 | length 2623.7
  L1(Sig) w10: C11.1 457.5,1941 457.5,1862.03 C8.1 C8.1@460,1860.51 ; v1(555,2170) 560.67,2175.67 592.24,2175.67 U2.32 U2.31 ; C13.1@694.63,1850.37 C13.1 C13.1@694.92,1849.33 ; L2.2@694.63,1930.78 L2.2 ; U2.17 v1(825,2343.9) 848.15,2343.9 C9.1 ; U2.11 866.55,2215.94 892.49,2190 v1(895,2190) 895,2187.5 1010,2072.5 v1(1010,2070) ; v1@909.76,1949.76 v1(910,1950) ; v1(1090,2100) 1096.9,2106.9 v1(1096.9,2193.82) ; R15.1 1458.78,2625.47 C4.1 ; v1(1470,2115) 1520,2115 1565,2160 v1(1565,2625) v1@1564.53,2625.47 ; v1@1492.26,2903.8 v1(1497.01,2903.8) 1565,2835.8 v1(1565,2775)
  L1(Sig) w19.68: v1(95,2885) R10.2 ; C8.1@460,1860.51 499.49,1900 v1(500,1900) ; C13.1@694.63,1850.37 L2.2@694.63,1930.78 ; C13.1@694.92,1849.33 694.92,1815.08 v1(710,1800) ; C14.1 855,1949.76 ; C10.1 855,1949.76 ; v1@909.76,1949.76 855,1949.76 ; v1(1096.9,2193.82) 1097.1,2193.62 v1@1110,2193.62 ; R4.2 1152.36,2230 1115.98,2193.62 v1@1110,2193.62 ; C21.1 1170.12,2190.63 1112.99,2190.63 v1@1110,2193.62 ; R3.2 1455,2100 v1(1470,2115) C22.1 ; R14.2 1476.05,2920 v1@1492.26,2903.8 ; C4.1 v1@1564.53,2625.47 ; D2.2 v1(1565,2775)
  L4(Sig) w10: v1(895,2190) v1@897.5,2187.5 ; v1@1015,2080 1035,2100 v1(1090,2100) ; v1(1565,2625) 1568.36,2628.36 1589.67,2628.36 1595,2633.69 1595,2745 v1(1565,2775)
+3V3_RF: C12.1 L2.1 U2.2 U2.3 | length 212.8
  L1(Sig) w10: U2.2@643.27,2146.14 U2.2 U2.3 662.05,2081.46 C12.1 691.75,2051.75 691.75,1972.09 L2.1
+VBUS: C1.1 D1.5 J1.A4_B9 J1.B4_A9 L1.1 | length 617.6
  L1(Sig) w10: v1(670,2840) 671.73,2841.73 J1.B4_A9 ; D1.5 v1(765,2840) ; J1.A4_B9 860.71,2845.71 v1(860,2845) 923.69,2781.31 930,2781.31 ; C1.1 930,2761.5 930,2781.31 ; L1.1 938.69,2790 930,2781.31
  L4(Sig) w10: v1(670,2840) v1(765,2840) 767.5,2842.5 857.5,2842.5 v1(860,2845)
+VBUS_FILT: C2.1 C3.1 C20.1 D5.5 J2.1 L1.2 U1.1 U1.3 | length 1966.9
  L1(Sig) w10: J2.1 232.52,2554.25 C20.1 394.5,2554.25 410.25,2570 v1(485,2570) 481.64,2566.64 481.64,2535.33 476.31,2530 v1(415,2530) ; v1(360,2475) 360.71,2475 378.19,2457.53 378.19,2432.09 D5.5 ; v1(1145,2755) C3.1 1141.97,2706.5 C2.1 1043.84,2717.65 L1.2 1192.95,2790 1245.55,2737.4 U1.1 ; v1(1205,2615) 1205,2622.05 1245.55,2662.6 U1.3
  L4(Sig) w10: v1(360,2475) v1(415,2530) ; v1(485,2570) 1160,2570 v1(1205,2615) 1205,2665 1180,2690 1180,2741.31 1169.67,2751.64 1148.36,2751.64 v1(1145,2755)
ANT_RF: ANT1.1 C16.1 L3.2 | length 353.3
  L1(Sig) w10: L3.2 L3.2@620.37,1965.78 ; C16.1@620.37,1910.37 C16.1
  L1(Sig) w11.54: ANT1.1 580,1825 620.75,1865.75 C16.1
  L1(Sig) w11.61: C16.1@620.37,1910.37 L3.2@620.37,1965.78
FSPI_CLK: R6.1 U4.8 | length 103.7
  L1(Sig) w10: R6.1 1315.83,2100.08 1335,2119.25 U4.8
FSPI_D: U2.13 U4.9 | length 618.5
  L1(Sig) w10: U2.13 904.69,2255.31 v1(940,2220) ; v1(1250,2135) 1250,2180.65 1277.01,2207.66 1277.01,2215.87 1277.09,2215.94 U4.9
  L4(Sig) w10: v1(940,2220) 1035,2125 1235.25,2125 1245.25,2135 v1(1250,2135)
FSPI_NCS: U2.16 U4.14 | length 495.3
  L1(Sig) w10: U2.16 U4.14
FSPI_NCS2: R3.1 U2.14 U4.5 | length 1016.8
  L1(Sig) w10: U2.14 975.25,2275 985.25,2265 v1(990,2265) ; R3.1 1374.25,2180.75 1355,2200 1355,2233.82 1376.5,2255.32 U4.5 ; U4.5@1379.37,2255 v1(1440,2255)
  L4(Sig) w10: v1(990,2265) 990,2310 1055,2375 1320,2375 v1(1440,2255)
FSPI_Q: R4.1 U2.6 U4.10 U4.15 | length 968.6
  L1(Sig) w9.84: U4.15@1285.37,2333.98 1316.02,2333.98 1325,2325 1325,2273.18 1337.18,2260.99 1337.3,2260.99
  L1(Sig) w10: v1(700,2105) 704.75,2105 714.95,2115.2 720.2,2115.2 720.2,2146.14 U2.6 ; v1(1230,2195) 1230,2196.89 1210.75,2216.14 R4.1 1255.61,2230 1261.16,2235.55 1285.22,2235.55 U4.10 1285.37,2235.71 1312.01,2235.71 1337.3,2260.99 ; U4.15 U4.15@1285.37,2333.98
  L4(Sig) w10: v1(700,2105) 850,2255 955,2255 990,2220 1140,2220 1165,2195 v1(1230,2195)
GND: ANT1.2 C1.2 C2.2 C3.2 C4.2 C5.2 C6.2 C7.1 C8.2 C9.2 C10.2 C11.2 C12.2 C13.2 C14.2 C15.2 C16.2 C17.2 C18.2 C19.2 C20.2 C21.2 C22.2 C23.2 D1.2 D5.2 J1.A1_B12 J1.B1_A12 J2.3 J2.MP1 J2.MP2 R1.1 R2.1 R11.1 R12.1 R13.1 SW1.1 SW2.1 U1.2 U2.33 U3.4 U3.9 U4.2 U4.3 U4.4 U4.6 U4.7 U4.11 X1.2 X1.4 | length 3477.4
  L1(Sig) w10: v1@190.37,2050.37 v1(190,2050) v1@190.59,2049.41 ; J2.3 280.39,2450.39 v1(295,2465) ; C17.2@289.63,2050.37 C17.2 ; v1(625,2830) v1@625,2834.75 ; U2.33@690.47,2245.47 U2.33 ; U3.9 757.56,2525 758.46,2524.09 758.46,2482.76 758.62,2482.6 758.62,2476.69 U3.4 856.54,2475.79 C6.2 952.2,2499.25 970,2481.46 C7.1 ; J1.A1_B12@892.2,2882.24 J1.A1_B12 J1.A1_B12@899.02,2886.06 ; v1@924.53,1855.47 v1(924.76,1855.24) v1@925,1855 ; v1(985,2635) C1.2 C2.2 ; v1@1033.5,3135 v1(1035,3135) ; v1(1055,2630) C2.2 ; v1(1070,2255) 1073.36,2258.36 1088.36,2258.36 1094.01,2264.01 1120,2264.01 1128.69,2255.32 U4.11 ; v1(1145,2600) C3.2 1145,2651.46 1121.46,2675 C2.2 ; v1(1210,2560) 1235,2585 C5.2 ; v1(1210,2700) U1.2 ; 1252.89,2841.64 1254.53,2840 ; U4.6 U4.7 1384.78,2215.87 1469.88,2215.87 C22.2 1470,2295 1450.63,2314.37 U4.2 U4.3 U4.4 ; v1@1564.53,2684.53 v1(1570,2690)
  L1(Sig) w19.68: X1.4 139.41,1880.59 v1(155,1865) ; v1@190.37,2050.37 C17.2@289.63,2050.37 ; X1.2 v1@190.59,2049.41 ; v1(335,3050) 337.13,3050 342.13,3055 SW1.1 ; C20.2 v1(350,2625) ; v1(380,1780) 400.47,1800.47 C8.2 ; v1(380,1845) C18.2 ; C11.2 v1(455,2040) ; C19.2 470.75,2866.38 485,2852.13 v1(485,2850) ; v1(545,1965) 546.51,1963.49 546.51,1952.75 C16.2 ; v1(550,2020) 551.51,2021.51 551.51,2032.25 C15.2 ; v1@625,2834.75 640.24,2849.99 J1.B1_A12 ; C12.2 750,2055 v1(775,2030) ; C13.2 768.49,1892.75 768.49,1898.49 v1(770,1900) ; C14.2 v1@924.53,1855.47 ; C10.2 v1(855,2060) ; J1.A1_B12@892.2,2882.24 922.8,2851.65 933.49,2851.65 ; C9.2 944.07,2360 v1(1002.03,2417.97) 971.21,2448.79 971.21,2479.26 C7.1 ; 933.49,2844.72 933.49,2826.51 v1(935,2825) ; v1(1005,2925) R2.1 ; R1.1 v1@1033.5,3135 ; v1(1050,2890) 1064.25,2890 C23.2 ; v1(1135,2150) 1137.13,2150 1152.88,2134.25 C21.2 ; v1(1215,2845) 1216.51,2843.49 1251.03,2843.49 1252.89,2841.64 ; R11.1 1254.25,2825.42 1254.53,2825.7 1254.53,2840 ; v1(1350,3040) 1352.13,3040 1362.13,3050 SW2.1 ; R12.1 v1(1405,1885) ; R13.1 v1(1400,1975) ; C22.2 1505.75,2215.75 v1(1525,2235) ; C4.2 v1@1564.53,2684.53
  other v1: 485,1715 660,2225 655,2290 740,2290
  other v2: 740,2225
INT_ACC: U2.10 U4.16 | length 1453
  L1(Sig) w10: U2.10 790.91,2195.35 800.75,2195.35 806.1,2190 855,2190 v1(920,2125) ; U4.16 1335,2405 v1(1340,2410)
  L4(Sig) w10: v1(920,2125) 1008.85,2036.15 1546.15,2036.15 1570,2060 1570,2340 1500,2410 v1(1340,2410)
INT_GYR_GPIO9: C23.1 R14.1 SW2.2 U2.15 U4.12 | length 1648.1
  L1(Sig) w10: U2.15 790.91,2293.78 809.6,2293.78 813.38,2290 v1(1175,2290) 1263.39,2290 1272.09,2281.31 1272.09,2280 1277.09,2275 U4.12 ; SW2.2 1119.09,2926.65 C23.1 R14.1 1409.25,2885.75 v1(1410,2885) ; v1(1215,2345) v1(1215,2435)
  L4(Sig) w10: v1(1175,2290) 1178.36,2293.36 1178.36,2308.36 v1(1215,2345) ; v1(1215,2435) 1410,2630 v1(1410,2885)
LDO_BY: C5.1 U1.4 | length 117.3
  L1(Sig) w10: C5.1 1325,2585 1350.28,2610.28 U1.4
LED_3V3_K: D2.1 R11.2 | length 173.8
  L1(Sig) w10: R11.2 1395.94,2820 D2.1
LED_A: D3.2 U2.8 | length 587.7
  L1(Sig) w10: U2.8 760.47,2109.53 v1(780,2090) ; v1(1065,1885) D3.2
  L4(Sig) w10: v1(780,2090) 915,2090 1065,1940 v1(1065,1885)
LED_A_K: D3.1 R12.2 | length 74.7
  L1(Sig) w10: D3.1 R12.2
LED_B: D4.2 U2.9 | length 474
  L1(Sig) w10: U2.9 799.84,2176.57 1001.42,1975 D4.2
LED_B_K: D4.1 R13.2 | length 79.7
  L1(Sig) w10: D4.1 R13.2
LNA_IN: C15.1 L3.1 U2.1 | length 144.3
  L1(Sig) w10: L3.1 L3.1@620.37,2004.22 ; C15.1@620.37,2069.63 C15.1 C15.1@621.77,2071.02 ; U2.1@621.77,2146.14 U2.1
  L1(Sig) w11.61: L3.1@620.37,2004.22 C15.1@620.37,2069.63 ; C15.1@621.77,2071.02 U2.1@621.77,2146.14
MCU_FSPI_CLK: R6.2 U2.12 | length 571.1
  L1(Sig) w10: U2.12 884.37,2235.63 1045,2075 1259.17,2075 1279.24,2095.07 1279.32,2095.07 1284.17,2099.92 R6.2
MCU_UART0_RX: R7.2 U2.27 | length 186.3
  L1(Sig) w10: R7.2 474.17,2219.17 530,2275 U2.27
MCU_UART0_TX: R8.2 U2.28 | length 291.4
  L1(Sig) w10: R8.2 345.08,2219.17 379.25,2185 465,2185 535.31,2255.31 U2.28
MCU_USB_D_N: D1.3 U2.25 | length 576.2
  L1(Sig) w9.84: U2.25 593.15,2336.85 580,2350 580,2410 593.15,2423.15 593.15,2638.15 620,2665 779.76,2665 802.4,2687.64 D1.3
MCU_USB_D_P: D1.1 U2.26 | length 583.2
  L1(Sig) w9.84: U2.26@593.15,2295 555,2295 555,2644.84 609.61,2699.45 D1.1
NetC17_1: C17.1 R9.2 X1.1 | length 247.8
  L1(Sig) w10: X1.1 190.59,1927.6 238.89,1879.3 R9.2@259.12,1879.3 ; R9.2 263.33,1953.33 290,1980 C17.1
NetC19_1: C19.1 R10.1 SW1.2 U2.7 | length 1578.9
  L1(Sig) w10: SW1.2 104.09,2980.91 126.5,2958.5 R10.1 129,2922.5 436.75,2922.5 C19.1 439.25,2869 415,2844.75 v1(415,2840) ; v1(740,2110) 740.79,2110.79 U2.7
  L4(Sig) w10: v1(415,2840) 436.31,2840 450,2826.31 450,2230 595,2085 710.6,2085 735.6,2110 v1(740,2110)
NetD5_4: D5.4 J2.2 | length 276.3
  L1(Sig) w10: J2.2 237.48,2510 405,2510 425,2490 425,2427.87 D5.4
NetD5_6: D5.6 J2.4 | length 137.4
  L1(Sig) w10: J2.4 335.31,2401.18 347.6,2413.46 D5.6
NetJ1_A5: J1.A5 R1.2 | length 319.9
  L1(Sig) w10: J1.A5 815.43,2945.68 835,2965.25 v1(835,2970) ; v1(985,3040) 988.36,3043.36 988.36,3058.36 R1.2
  L4(Sig) w10: v1(835,2970) 838.36,2966.64 868.67,2966.64 880.32,2955 900,2955 v1(985,3040)
NetJ1_B5: J1.B5 R2.2 | length 395.7
  L1(Sig) w10: J1.B5 697.32,2967.32 730,3000 R2.2
NetR15_2: R15.2 U1.5 | length 94
  L1(Sig) w10: U1.5 1364.45,2737.4 1389.25,2712.6 1403.15,2712.6 R15.2
SPI_CLK: U2.22 U3.6 | length 409
  L1(Sig) w10: U2.22 662.05,2621.31 670.74,2630 730.24,2630 738.94,2621.31 738.94,2575.12 U3.6
SPI_DI: U2.23 U3.5 | length 491.2
  L1(Sig) w10: U2.23@641.46,2354.65 U2.23@642.36,2353.74 ; U2.23 U2.23@642.36,2353.74 ; U3.5 760,2574.68 760,2636.31 751.31,2645 643.69,2645 635,2636.31 635,2425 642.36,2417.64 U2.23@642.36,2353.74
SPI_DO: U2.24 U3.2 | length 217.9
  L1(Sig) w10: v1(610,2385) 621.77,2373.23 621.77,2344.8 U2.24 ; v1(715,2430) 715,2434.75 719.54,2439.29 719.54,2475.17 U3.2
  L4(Sig) w10: v1(610,2385) 670,2385 v1(715,2430)
SPI_NCS: U2.21 U3.1 | length 144.5
  L1(Sig) w10: U2.21 680.83,2344.8 680.83,2374.33 680,2375.16 680,2455.32 693.66,2468.98 699.57,2468.98 700.47,2469.88 U3.1
SPI_NHLD: U2.19 U3.7 | length 369.9
  L1(Sig) w10: U3.7 720.16,2568.31 721.06,2567.4 721.06,2558.94 735,2545 v1(815,2545) ; U2.19 721.1,2376.1 741.88,2396.88 766.66,2396.88 781.64,2411.86 781.64,2436.64 v1(785,2440)
  L4(Sig) w10: v1(785,2440) 785,2441.47 815,2471.47 v1(815,2545)
SPI_NWP: U2.20 U3.3 | length 149
  L1(Sig) w10: U2.20 700.51,2344.8 700.51,2374.49 700,2375 739.84,2414.84 U3.3
UART0_RX: D5.3 R7.1 | length 87.1
  L1(Sig) w10: D5.3 422.4,2258.35 429.92,2250.83 R7.1
UART0_TX: D5.1 R8.1 | length 85
  L1(Sig) w10: R8.1 346.3,2252.13 346.3,2333.43 D5.1
USB_D_N: D1.4 J1.A7 J1.B7 | length 267.9
  L1(Sig) w10: J1.A7 756.38,2951.31 765.07,2960 785,2960 795,2950 795,2893.62 J1.B7 795.75,2876.34 802.4,2869.69 D1.4
USB_D_P: D1.6 J1.B6 | length 106.6
  L1(Sig) w10: D1.6 727.6,2801.81 736.69,2810.91 J1.B6
VCC: C6.1 C7.2 U2.18 U3.8 | length 864
  L1(Sig) w10: U3.8 701.38,2575.12 701.38,2601.63 705,2605.25 v1(705,2610) ; U2.18 740.79,2353.74 772.05,2385 v1(795,2385) ; C6.1 885.24,2535.98 890.39,2535.98 893.93,2539.53 910,2539.53 ; v1(910,2595) 910,2539.53 ; C7.2 910,2539.53
  L1(Sig) w19.68: C7.2 1033.34,2539.53 1042.87,2530 v1(1045,2530)
  L4(Sig) w10: v1(705,2610) 895,2610 v1(910,2595) ; v1(795,2385) 900,2385 v1(1045,2530)
XTAL_N: C18.1 U2.29 X1.3 | length 743.5
  L1(Sig) w10: X1.3 139.41,2089.41 170,2120 315,2120 372.5,2062.5 ; C18.1 380,2055 372.5,2062.5 ; U2.29 545.63,2235.63 372.5,2062.5
XTAL_P: R9.1 U2.30 | length 609.2
  L1(Sig) w10: v1(295,1815) R9.1 ; v1(505,2120) 508.36,2123.36 508.36,2173.36 550.04,2215.04 592.24,2215.04 U2.30
  L4(Sig) w10: v1(295,1815) 505,2025 v1(505,2120)
pads on no net: ANT1.3 ANT1.4 ANT1.5 ANT1.6 ANT1.7 ANT1.8 ANT1.9 ANT1.10 ANT1.11 ANT1.12 J1. J1.A6 J1.A8 J1.B8 J1.S1 J1.S2 J1.S3 J1.S4 U2.4 U2.5 U4.1 U4.13

## Polygon pours and split planes (outlines as drawn)
GND on L1(Sig) "GND_L01_P000" (solid, pour order 0): 15,3160 15,1710 525,1750 525,2095 565,2135 565,2200 675,2200 690,2185 690,1780 1605,1780 1600,1785 1600,3150 25,3150
GND on L2 (GND) "GND_L02_P001" (solid, pour order 1): 15,3160 15,1715 435,1715 450,1700 1100,1700 1100,1730 1105,1725 1600,1725 1600,3155 1595,3160 20,3160
GND on L3(GND) "GND_L03_P002" (solid, pour order 2): 20,3160 20,1710 445,1710 445,1690 1095,1690 1095,1730 1100,1725 1595,1725 1595,3150 1600,3155 1595,3160 25,3160
+3V3 on L4(Sig) "+3V3_L04_P003" (solid, pour order 3): 20,1745 25,1740 30,1745 1605,1745 1605,3145 1595,3155 1585,3145 20,3145

## Text inside footprints (layer, text, board x,y; h text height)
J1: Top 3D Body "PCB EDGE" at 561.5,3154.69 h24 r180